# Altium PCB hat.PcbDoc (part 2 of 2)
Units mm, origin at the board's own origin, x right, y up, seen from the top; angles counter-clockwise.
Board outline 64 x 85 mm, 4 copper layers (Top Layer, Ground Plane, Power Plane, Bottom Layer), stack 0.844 mm thick; 119 components, 62 nets, 343 pads, 67 vias.
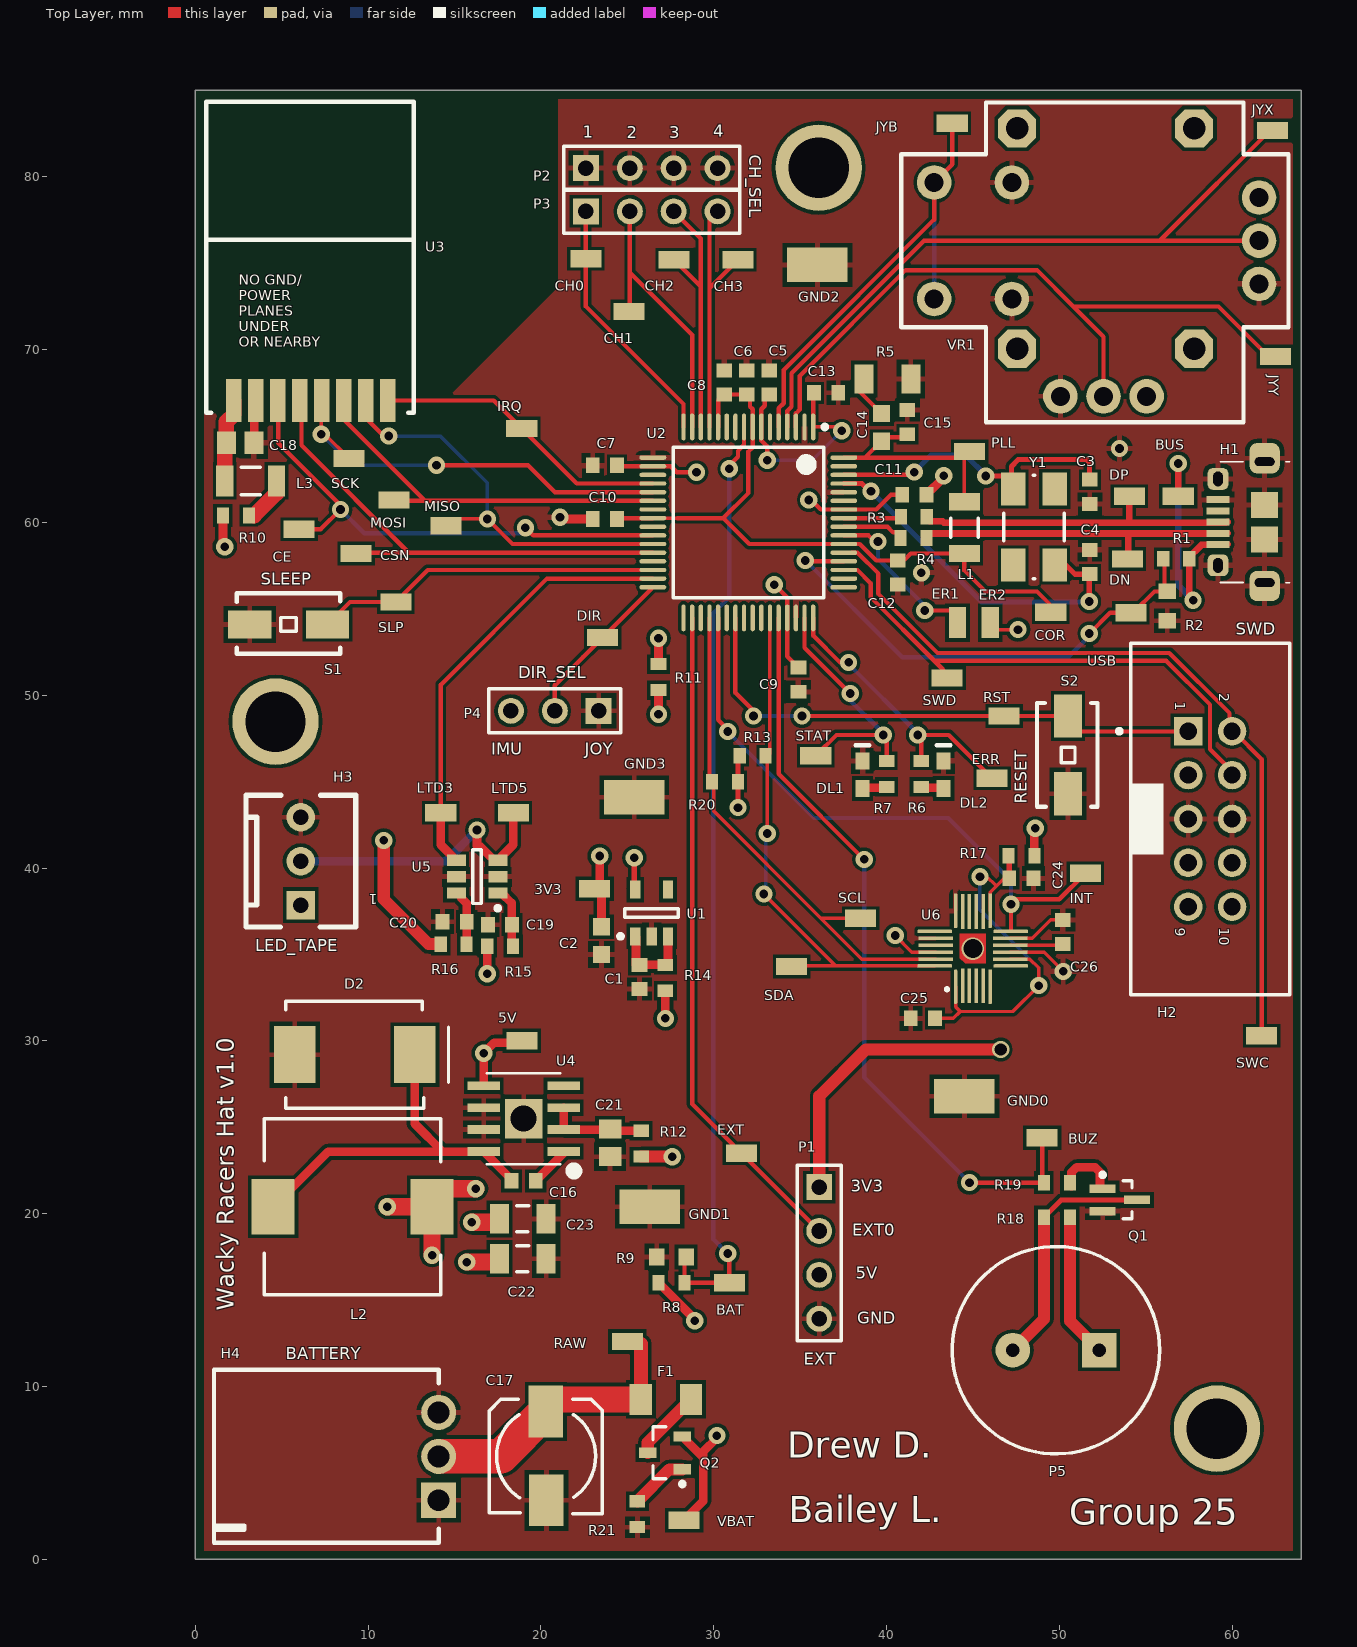
[diagram p0: Top Layer view]

## Silkscreen, mask and mechanical layers (free items; w line width, h text height) (continued)
Top Overlay: (continued)
  text "5V" at 38.215,16.234 h0.7
  text "Wacky Racers Hat v1.0" at 2.215,14.378 h1 r90
  text "GND" at 38.287,13.627 h0.7
  text "BATTERY" at 5.223,11.576 h0.7
  text "EXT" at 35.207,11.247 h0.7
  text "Drew D." at 34.252,5.888 h1.52
  text "Bailey L." at 34.348,2.132 h1.52
  text "Group 25" at 50.575,1.987 h1.52
Board Outline:
  the board outline again, w0.254

## Dimensions
64,86 to 0,86 on Mechanical 1
65,85 to 65,0 on Mechanical 1

## Text inside footprints (layer, text, board x,y; h text height)
H1: Mechanical 1 "PCB Edge" at 64.144,57.866 h0.6 r90
H2: Top Overlay "9" at 56.699,36.56 h0.6 r270; Top Overlay "10" at 59.239,36.56 h0.6 r270; Top Overlay "1" at 56.699,49.62 h0.6 r270; Top Overlay "2" at 59.239,50.12 h0.6 r270
H3: Top Overlay "1" at 10.545,38.495 h0.6 r180
U3: Top Overlay "NO GND/ / POWER / PLANES / UNDER / OR NEARBY" at 2.505,70.156 h0.6
U4: Mechanical 13 "*" at 20.93,24.344 h0.6 r180